# Altium PCB InvertedLayer.PcbDoc
Units mil, origin at the board's own origin, x right, y up, seen from the top; angles counter-clockwise.
Board outline 3464.57 x 3464.57 mil, 2 copper layers (Top Layer, Bottom Layer); 50 components, 28 nets, 154 pads, 84 vias.
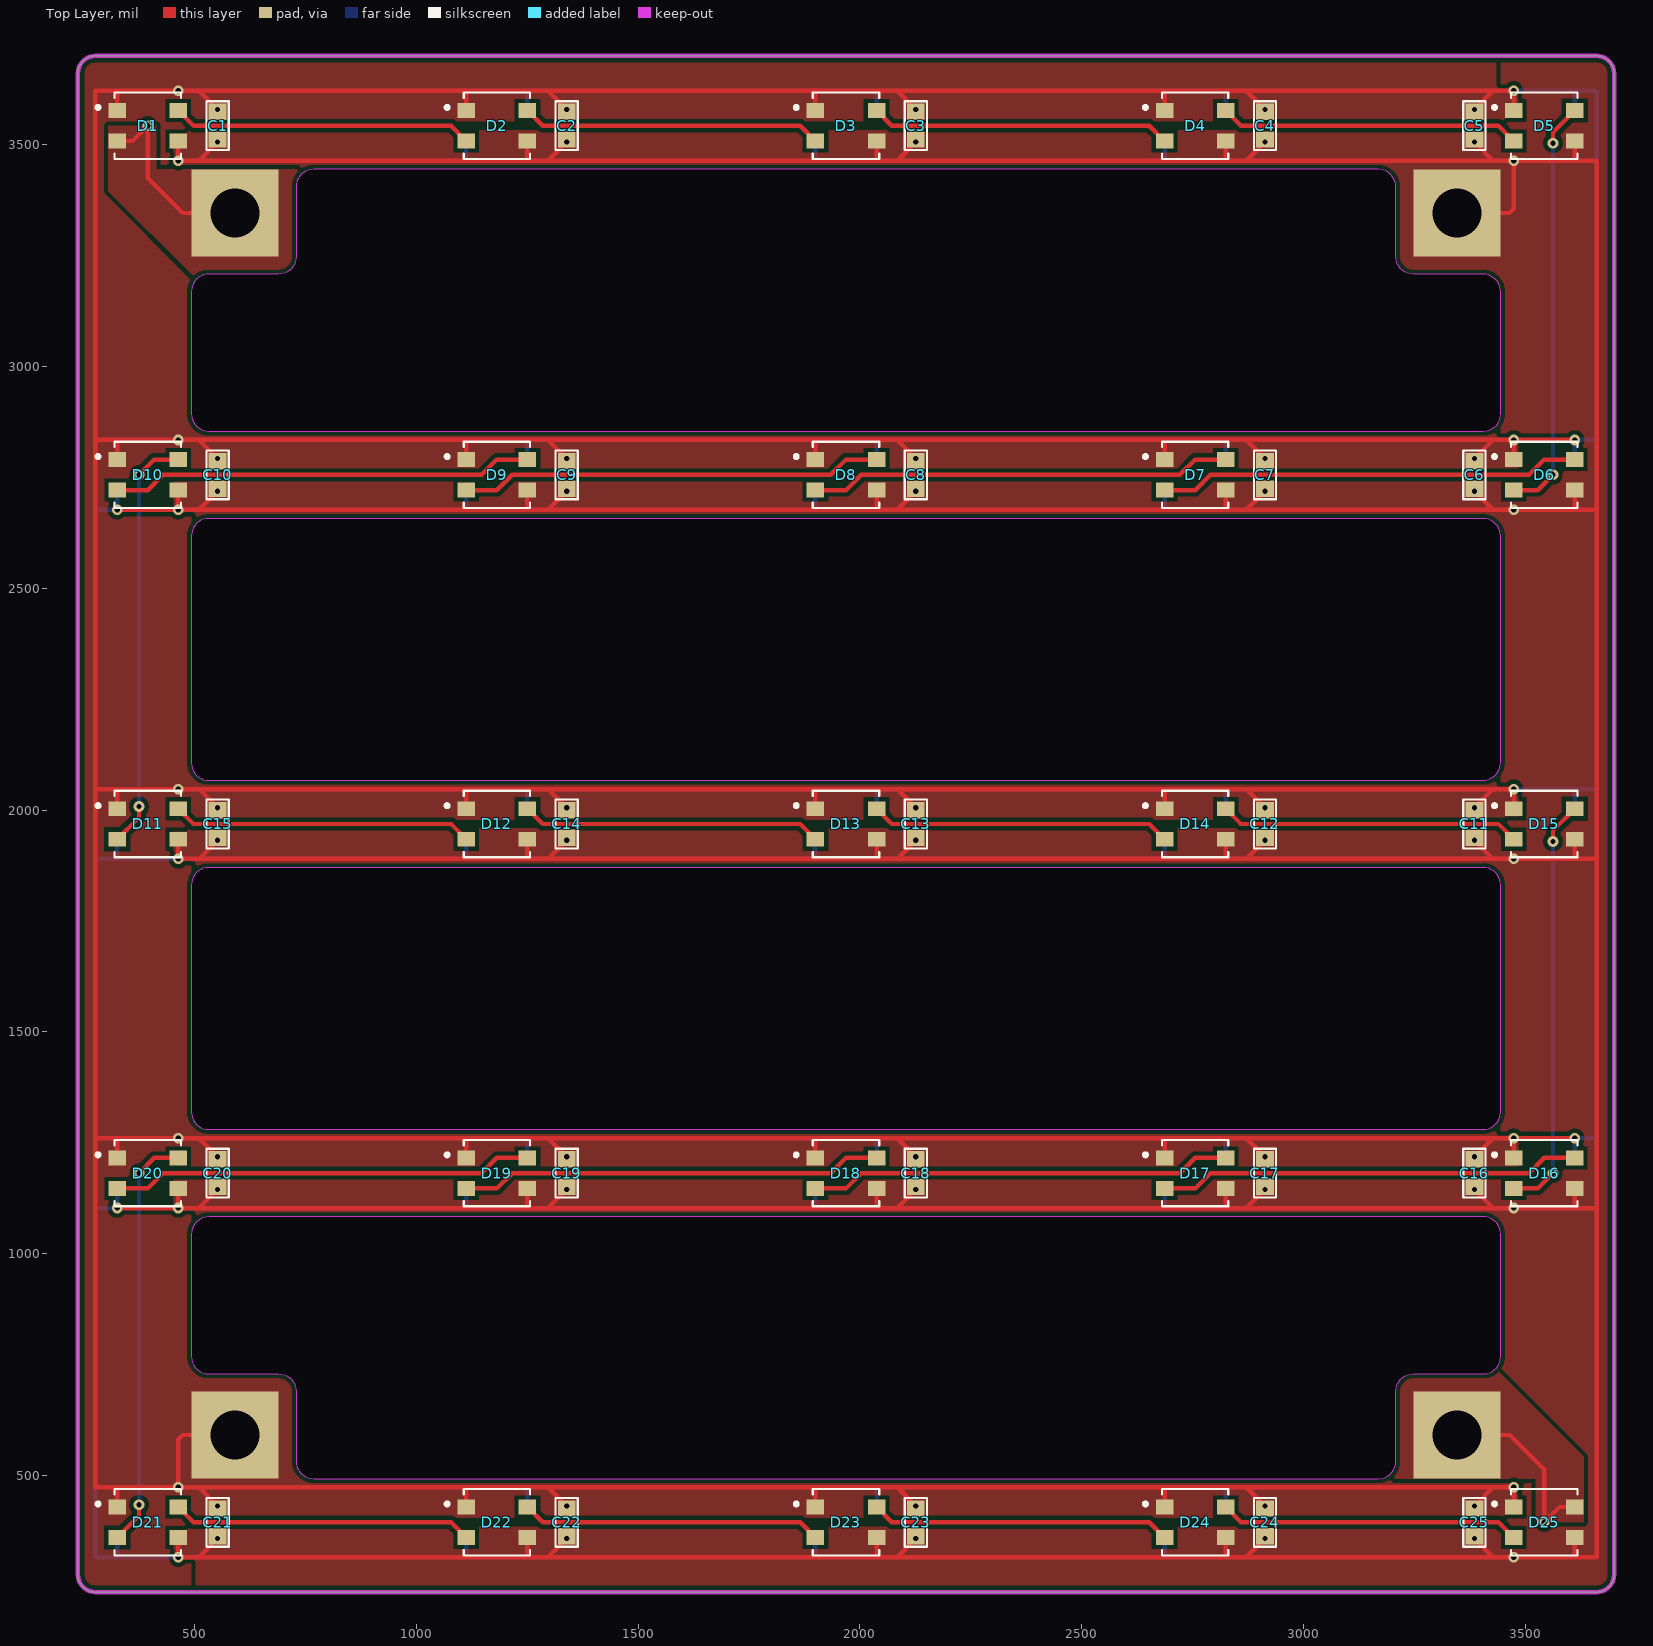
[diagram p0: Top Layer view]
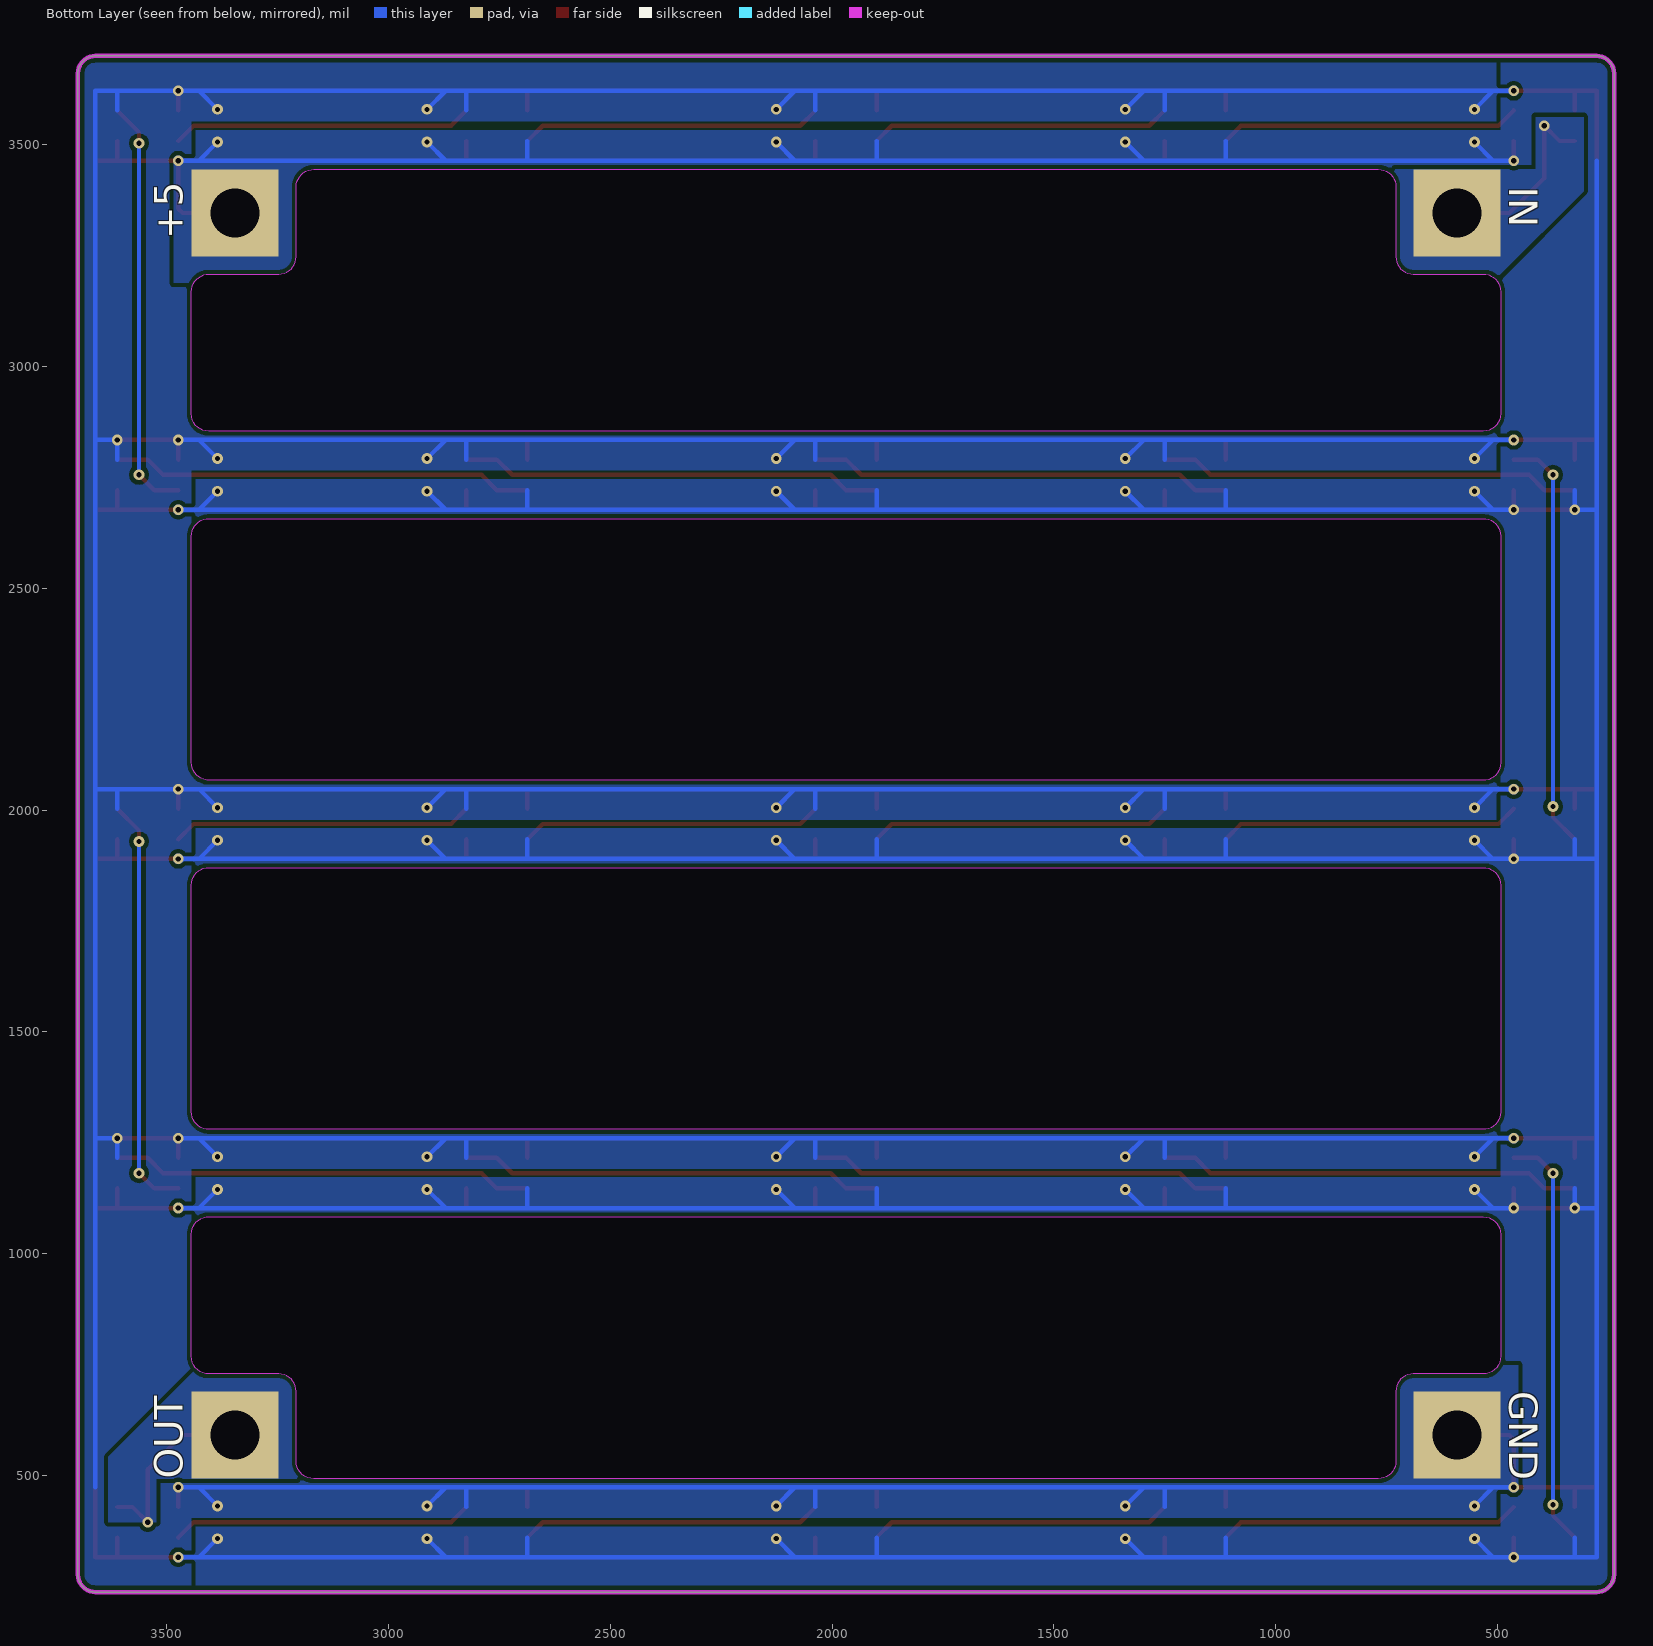
[diagram p1: Bottom Layer view, seen from below]
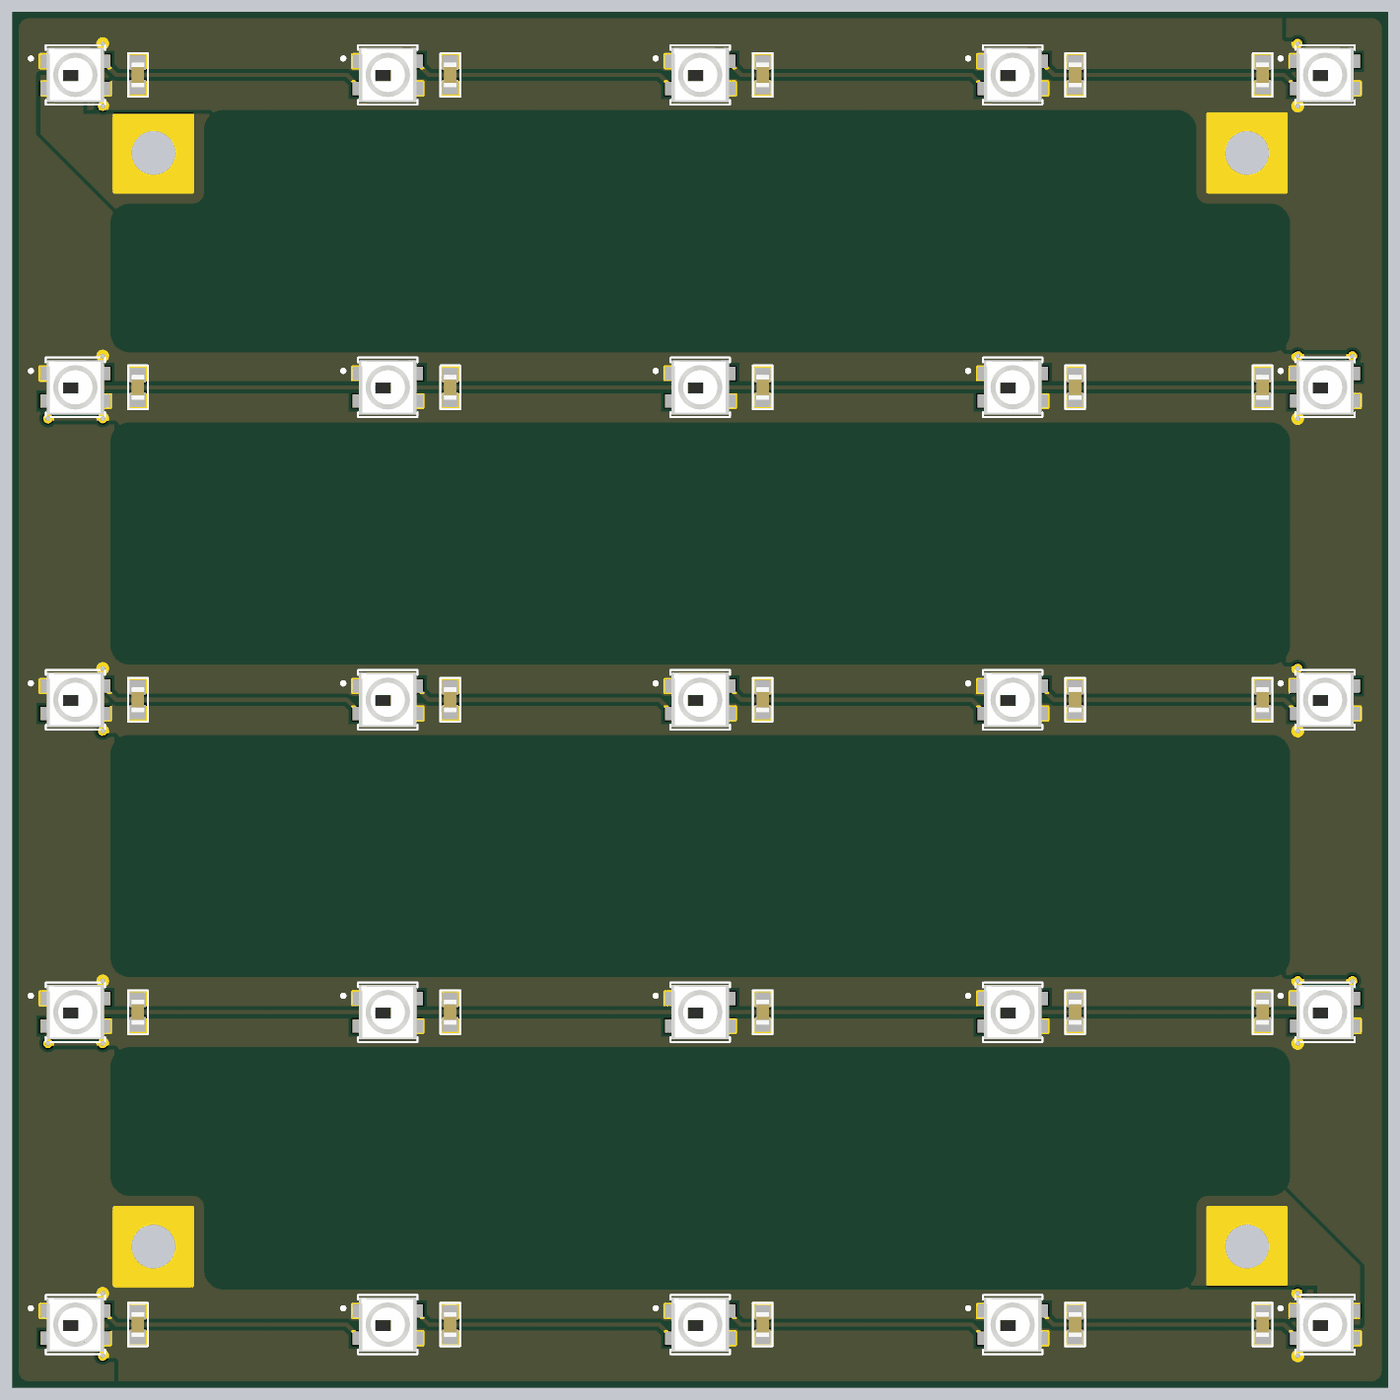
[diagram p2: 3D render of the assembled board from above, using the file's embedded part models]

## Layer stack, top to bottom
Top Solder: solder mask 0.4, Solder Resist, Dk 3.5
Top Layer: signal copper 1.4
Dielectric 1: dielectric 12.6, FR-4, Dk 4.8
Bottom Layer: signal copper 1.4
Bottom Solder: solder mask 0.4, Solder Resist, Dk 3.5

## Board outline
236.22,275.59 236.22,3661.42 cw(c275.59,3661.42) 275.59,3700.79 3661.42,3700.79 cw(c3661.42,3661.42) 3700.79,3661.42 3700.79,275.59 cw(c3661.42,275.59) 3661.42,236.22 275.59,236.22 cw(c275.59,275.59)
cut-out: 531.5,2854.33 3405.98,2854.33 ccw(c3405.98,2893.23) 3444.88,2893.23 3444.88,3168.53 ccw(c3404.76,3168.54) 3404.76,3208.66 3248.03,3208.66 cw(c3248.03,3248.03) 3208.66,3248.03 3208.66,3404.75 ccw(c3168.54,3404.76) 3168.53,3444.88 767.72,3444.88 ccw(c767.72,3405.51) 728.35,3405.51 728.35,3248.03 cw(c688.98,3248.03) 688.98,3208.66 531.5,3208.66 ccw(c531.5,3169.29) 492.13,3169.29 492.13,2893.7 ccw(c531.5,2893.7)
cut-out: 3405.51,1082.68 531.5,1082.68 ccw(c531.5,1043.31) 492.13,1043.31 492.13,767.72 ccw(c531.5,767.72) 531.5,728.35 688.98,728.35 cw(c688.98,688.98) 728.35,688.98 728.35,531.5 ccw(c767.72,531.5) 767.72,492.13 3169.29,492.13 ccw(c3169.29,531.5) 3208.66,531.5 3208.66,688.98 cw(c3248.03,688.98) 3248.03,728.35 3405.51,728.35 ccw(c3405.51,767.72) 3444.88,767.72 3444.88,1043.31 ccw(c3405.51,1043.31)
cut-out: 492.13,2618.11 492.13,2106.3 ccw(c531.5,2106.3) 531.5,2066.93 3403.97,2066.93 ccw(c3403.97,2107.84) 3444.88,2107.84 3444.88,2617.35 ccw(c3404.76,2617.35) 3404.76,2657.48 531.5,2657.48 ccw(c531.49,2618.11)
cut-out: 492.13,1830.71 492.13,1318.9 ccw(c531.5,1318.9) 531.5,1279.53 3404.76,1279.53 ccw(c3404.76,1319.65) 3444.88,1319.65 3444.88,1830.71 ccw(c3405.51,1830.71) 3405.51,1870.08 531.5,1870.08 ccw(c531.5,1830.71)

## Design rules (kind name [scope] priority, off if disabled: settings)
Clearance [All] p1: gap=6 ignorepadtopadclearanceinfootprint=FALSE
PolygonConnect [All] p1: connectstyle=Direct reliefconductorwidth=10 reliefentries=4 polygonreliefangle="90 Angle" airgapwidth=10
RoutingVias [All] p1: holewidth=12 width=24 viastyle="Through Hole" minholewidth=12 minwidth=24 maxholewidth=100 maxwidth=100
SolderMaskExpansion [All] p1: expansion=4
UnRoutedNet [All] p1: checkbadconnections=TRUE
Width [All] p1: maxlimit=20 minlimit=8 preferedwidth=10
29 further rules are at their usual default settings.

## Components (designator, comment, footprint, x,y, rotation, side; value= is the part's Value field where it differs from the comment)
C1 "CAP0603_100nF_X7R" C0603 551.18,3543.31 r270 top
C2 "CAP0603_100nF_X7R" C0603 1338.58,3543.31 r90 top
C3 "CAP0603_100nF_X7R" C0603 2125.98,3543.31 r90 top
C4 "CAP0603_100nF_X7R" C0603 2913.39,3543.31 r90 top
C5 "CAP0603_100nF_X7R" C0603 3385.83,3543.31 r90 top
C6 "CAP0603_100nF_X7R" C0603 3385.83,2755.91 r270 top
C7 "CAP0603_100nF_X7R" C0603 2913.39,2755.91 r270 top
C8 "CAP0603_100nF_X7R" C0603 2125.98,2755.91 r270 top
C9 "CAP0603_100nF_X7R" C0603 1338.58,2755.91 r270 top
C10 "CAP0603_100nF_X7R" C0603 551.18,2755.91 r270 top
C11 "CAP0603_100nF_X7R" C0603 3385.83,1968.5 r270 top
C12 "CAP0603_100nF_X7R" C0603 2913.39,1968.5 r270 top
C13 "CAP0603_100nF_X7R" C0603 2125.98,1968.5 r270 top
C14 "CAP0603_100nF_X7R" C0603 1338.58,1968.5 r270 top
C15 "CAP0603_100nF_X7R" C0603 551.18,1968.5 r270 top
C16 "CAP0603_100nF_X7R" C0603 3385.83,1181.1 r270 top
C17 "CAP0603_100nF_X7R" C0603 2913.39,1181.1 r270 top
C18 "CAP0603_100nF_X7R" C0603 2125.98,1181.1 r270 top
C19 "CAP0603_100nF_X7R" C0603 1338.58,1181.1 r270 top
C20 "CAP0603_100nF_X7R" C0603 551.18,1181.1 r270 top
C21 "CAP0603_100nF_X7R" C0603 551.18,393.7 r270 top
C22 "CAP0603_100nF_X7R" C0603 1338.58,393.7 r270 top
C23 "CAP0603_100nF_X7R" C0603 2125.98,393.7 r270 top
C24 "CAP0603_100nF_X7R" C0603 2913.39,393.7 r270 top
C25 "CAP0603_100nF_X7R" C0603 3385.83,393.7 r270 top
D1 "WS2812B-Mini" WS2812B-3535 393.7,3543.31 r0 top locked
D2 "WS2812B-Mini" WS2812B-3535 1181.1,3543.31 r0 top locked
D3 "WS2812B-Mini" WS2812B-3535 1968.5,3543.31 r0 top locked
D4 "WS2812B-Mini" WS2812B-3535 2755.91,3543.31 r0 top locked
D5 "WS2812B-Mini" WS2812B-3535 3543.31,3543.31 r0 top locked
D6 "WS2812B-Mini" WS2812B-3535 3543.31,2755.91 r0 top locked
D7 "WS2812B-Mini" WS2812B-3535 2755.91,2755.91 r0 top locked
D8 "WS2812B-Mini" WS2812B-3535 1968.5,2755.91 r0 top locked
D9 "WS2812B-Mini" WS2812B-3535 1181.1,2755.91 r0 top locked
D10 "WS2812B-Mini" WS2812B-3535 393.7,2755.91 r0 top locked
D11 "WS2812B-Mini" WS2812B-3535 393.7,1968.5 r0 top locked
D12 "WS2812B-Mini" WS2812B-3535 1181.1,1968.5 r0 top locked
D13 "WS2812B-Mini" WS2812B-3535 1968.5,1968.5 r0 top locked
D14 "WS2812B-Mini" WS2812B-3535 2755.91,1968.5 r0 top locked
D15 "WS2812B-Mini" WS2812B-3535 3543.31,1968.5 r0 top locked
D16 "WS2812B-Mini" WS2812B-3535 3543.31,1181.1 r0 top locked
D17 "WS2812B-Mini" WS2812B-3535 2755.91,1181.1 r0 top locked
D18 "WS2812B-Mini" WS2812B-3535 1968.5,1181.1 r0 top locked
D19 "WS2812B-Mini" WS2812B-3535 1181.1,1181.1 r0 top locked
D20 "WS2812B-Mini" WS2812B-3535 393.7,1181.1 r0 top locked
D21 "WS2812B-Mini" WS2812B-3535 393.7,393.7 r0 top locked
D22 "WS2812B-Mini" WS2812B-3535 1181.1,393.7 r0 top locked
D23 "WS2812B-Mini" WS2812B-3535 1968.5,393.7 r0 top locked
D24 "WS2812B-Mini" WS2812B-3535 2755.91,393.7 r0 top locked
D25 "WS2812B-Mini" WS2812B-3535 3543.31,393.7 r0 top locked

## Footprints (in the part's own frame and the unit in brackets; to place one, negate y for a bottom-side part, rotate by r counter-clockwise, add the part's x,y. Pads: shape width x height; smd on the part's side, far side on the other; paste and mask are expansions set on the pad)
C0603 [mm]
  rect 0.94x1.02 smd: 1(-0.79,0) 2(0.79,0)
  silkscreen extent -1.4,-0.64 1.4,0.64, body extent -0.8,-0.41 0.8,0.41, height 0.82
WS2812B-3535 [mm]
  rect 1x0.85 smd: 1(-1.75,0.875) 2(-1.75,-0.875) 3(1.75,-0.875) 4(1.75,0.875)
  silkscreen extent -2.95,-1.9 1.9,1.9, body extent -1.84,-1.74 1.84,1.74, height 1.96

## Part data
C1 C2 C3 C4 C5 C6 C7 C8 C9 C10 C11 C12 C13 C14 C15 C16 C17 C18 C19 C20 C21 C22 C23 C24 C25: library part CAP, "CAP0603 100nF X5R/X7R 25V", LCSC Part #=C1590, MF="Samsung Electro-Mechanics", MP=CL10B104KA8NNNC
D1 D2 D3 D4 D5 D6 D7 D8 D9 D10 D11 D12 D13 D14 D15 D16 D17 D18 D19 D20 D21 D22 D23 D24 D25: library part WS2812B-3535, "WS2812B-Mini 35x35mm", LCSC Part #=C114583, MF=Worldsemi, MP=WS2812B-Mini

## Free pads (board coordinates)
  rect 196.85x196.85 hole 110.24: ""(590.55,590.55) ""(590.55,3346.46) ""(3346.46,590.55) ""(3346.46,3346.46)

## Via types
v1: diameter 24, hole 12, Top Layer to Bottom Layer, tented both sides, 50 vias
v2: diameter 24, hole 12, Top Layer to Bottom Layer, 34 vias

## Nets (pads, with @x,y where several pads share a name; then routed paths per layer and width w, separated by ;. In a path a pad name is that pad's centre, name@x,y a point inside that pad or via, vN(x,y) a via of type N, cw(c..) or ccw(c..) an arc to the next point about the centre after c; other vN are vias at no path point)
+5: C1.2 C2.1 C3.1 C4.1 C5.1 C6.2 C7.2 C8.2 C9.2 C10.2 C11.2 C12.2 C13.2 C14.2 C15.2 C16.2 C17.2 C18.2 C19.2 C20.2 C21.2 C22.2 C23.2 C24.2 C25.2 D1.3 D2.3 D3.3 D4.3 D5.3 D6.3 D7.3 D8.3 D9.3 D10.3 D11.3 D12.3 D13.3 D14.3 D15.3 D16.3 D17.3 D18.3 D19.3 D20.3 D21.3 D22.3 D23.3 D24.3 D25.3 pad.@3346.46,3346.46 | length 43384.9
  Top Layer w10: v2(324.8,1102.36) v2(462.6,1102.36) ; v2(324.8,2677.17) v2(462.6,2677.17) ; D21.3 v2(462.6,314.96) 509.25,314.96 ; D20.3 v2(462.6,1102.36) ; D11.3 v2(462.6,1889.76) 509.25,1889.76 ; D10.3 v2(462.6,2677.17) ; D1.3 v2(462.6,3464.57) 509.25,3464.57 ; v1(551.18,356.89) 509.25,314.96 ; 551.18,1102.36 509.25,1102.36 ; v1(551.18,1144.29) 509.25,1102.36 ; v1(551.18,1931.69) 509.25,1889.76 ; 551.18,2677.17 509.25,2677.17 ; v1(551.18,2719.09) 509.25,2677.17 ; v1(551.18,3506.5) 509.25,3464.57 ; D22.3 1250,314.96 ; D19.3 1250,1102.36 ; D12.3 1250,1889.76 ; D9.3 1250,2677.17 ; D2.3 1250,3464.57 ; v1(1338.58,356.89) 1296.65,314.96 ; v1(1338.58,1144.29) 1296.65,1102.36 ; v1(1338.58,1931.69) 1296.65,1889.76 ; v1(1338.58,2719.09) 1296.65,2677.17 ; v1(1338.58,3506.5) 1296.65,3464.57 ; D23.3 2037.4,314.96 ; D18.3 2037.4,1102.36 ; D13.3 2037.4,1889.76 ; D8.3 2037.4,2677.17 ; D3.3 2037.4,3464.57 ; v1(2125.98,356.89) 2084.06,314.96 ; v1(2125.98,1144.29) 2084.06,1102.36 ; v1(2125.98,1931.69) 2084.06,1889.76 ; v1(2125.98,2719.09) 2084.06,2677.17 ; v1(2125.98,3506.5) 2084.06,3464.57 ; D24.3 2824.8,314.96 ; D17.3 2824.8,1102.36 ; D14.3 2824.8,1889.76 ; D7.3 2824.8,2677.17 ; D4.3 2824.8,3464.57 ; v1(2913.39,356.89) 2871.46,314.96 ; v1(2913.39,1144.29) 2871.46,1102.36 ; v1(2913.39,1931.69) 2871.46,1889.76 ; v1(2913.39,2719.09) 2871.46,2677.17 ; v1(2913.39,3506.5) 2871.46,3464.57 ; pad.@3346.46,3346.46 3464.57,3346.46 3474.41,3356.3 v2(3474.41,3464.57) ; v1(3385.83,356.89) 3427.76,314.96 ; v1(3385.83,1144.29) 3427.76,1102.36 ; v1(3385.83,1931.69) 3427.76,1889.76 ; v1(3385.83,2719.09) 3427.76,2677.17 ; v1(3385.83,3506.5) 3427.76,3464.57 ; v2(3474.41,314.96) 3427.76,314.96 ; D25.3 3612.2,314.96 ; D16.3 3612.2,1102.36 ; D15.3 3612.2,1889.76 ; D6.3 3612.2,2677.17 ; D5.3 3612.2,3464.57 ; 3661.42,1102.36 3612.2,1102.36 ; 3661.42,1889.76 3612.2,1889.76 ; 3661.42,2677.17 3612.2,2677.17 ; v2(462.6,1102.36) 509.25,1102.36 ; v2(462.6,2677.17) 509.25,2677.17 ; 509.25,314.96 1250,314.96 ; 509.25,1102.36 1250,1102.36 ; 509.25,1889.76 1250,1889.76 ; 509.25,2677.17 1250,2677.17 ; 509.25,3464.57 1250,3464.57 ; 1250,314.96 1296.65,314.96 ; 1250,1102.36 1296.65,1102.36 ; 1250,1889.76 1296.65,1889.76 ; 1250,2677.17 1296.65,2677.17 ; 1250,3464.57 1296.65,3464.57 ; 1296.65,314.96 2037.4,314.96 ; 1296.65,1102.36 2037.4,1102.36 ; 1296.65,1889.76 2037.4,1889.76 ; 1296.65,2677.17 2037.4,2677.17 ; 1296.65,3464.57 2037.4,3464.57 ; 2037.4,314.96 2084.06,314.96 ; 2037.4,1102.36 2084.06,1102.36 ; 2037.4,1889.76 2084.06,1889.76 ; 2037.4,2677.17 2084.06,2677.17 ; 2037.4,3464.57 2084.06,3464.57 ; 2084.06,314.96 2824.8,314.96 ; 2084.06,1102.36 2824.8,1102.36 ; 2084.06,1889.76 2824.8,1889.76 ; 2084.06,2677.17 2824.8,2677.17 ; 2084.06,3464.57 2824.8,3464.57 ; 2824.8,314.96 2871.46,314.96 ; 2824.8,1102.36 2871.46,1102.36 ; 2824.8,1889.76 2871.46,1889.76 ; 2824.8,2677.17 2871.46,2677.17 ; 2824.8,3464.57 2871.46,3464.57 ; 2871.46,314.96 3427.76,314.96 ; 2871.46,1102.36 3427.76,1102.36 ; 2871.46,1889.76 3427.76,1889.76 ; 2871.46,2677.17 3427.76,2677.17 ; 2871.46,3464.57 3427.76,3464.57 ; 3427.76,314.96 3612.2,314.96 ; 3427.76,1102.36 3612.2,1102.36 ; 3427.76,1889.76 v2(3474.41,1889.76) 3612.2,1889.76 ; 3427.76,2677.17 v2(3474.41,2677.17) 3612.2,2677.17 ; 3427.76,3464.57 v2(3474.41,3464.57) ; v2(3474.41,3464.57) 3612.2,3464.57 ; 3612.2,314.96 3661.42,314.96 3661.42,359.25 3661.42,1934.06 3661.42,2721.46 3661.42,3464.57 3612.2,3464.57
  Bottom Layer w10: 275.59,3464.57 275.59,2677.17 ; 324.8,359.25 324.8,314.96 ; 324.8,1146.65 v2(324.8,1102.36) 275.59,1102.36 ; 324.8,1934.06 324.8,1889.76 ; 324.8,2721.46 v2(324.8,2677.17) 275.59,2677.17 ; v2(462.6,1102.36) 509.25,1102.36 ; v2(462.6,2677.17) 509.25,2677.17 ; v2(462.6,3464.57) 509.25,3464.57 ; v1(551.18,356.89) 509.25,314.96 ; v1(551.18,1144.29) 509.25,1102.36 ; v1(551.18,1931.69) 509.25,1889.76 ; v1(551.18,2719.09) 509.25,2677.17 ; v1(551.18,3506.5) 509.25,3464.57 ; 1112.2,359.25 1112.2,314.96 ; 1112.2,1146.65 1112.2,1102.36 ; 1112.2,1934.06 1112.2,1889.76 ; 1112.2,2721.46 1112.2,2677.17 ; 1112.2,3508.86 1112.2,3464.57 ; v1(1338.58,356.89) 1296.65,314.96 ; v1(1338.58,1144.29) 1296.65,1102.36 ; v1(1338.58,1931.69) 1296.65,1889.76 ; v1(1338.58,2719.09) 1296.65,2677.17 ; v1(1338.58,3506.5) 1296.65,3464.57 ; 1899.61,359.25 1899.61,314.96 ; 1899.61,1146.65 1899.61,1102.36 ; 1899.61,1934.06 1899.61,1889.76 ; 1899.61,2721.46 1899.61,2677.17 ; 1899.61,3508.86 1899.61,3464.57 ; v1(2125.98,356.89) 2084.06,314.96 ; v1(2125.98,1144.29) 2084.06,1102.36 ; v1(2125.98,1931.69) 2084.06,1889.76 ; v1(2125.98,2719.09) 2084.06,2677.17 ; v1(2125.98,3506.5) 2084.06,3464.57 ; 2687.01,359.25 2687.01,314.96 ; 2687.01,1146.65 2687.01,1102.36 ; 2687.01,1934.06 2687.01,1889.76 ; 2687.01,2721.46 2687.01,2677.17 ; 2687.01,3508.86 2687.01,3464.57 ; v1(2913.39,356.89) 2871.46,314.96 ; v1(2913.39,1144.29) 2871.46,1102.36 ; v1(2913.39,1931.69) 2871.46,1889.76 ; v1(2913.39,2719.09) 2871.46,2677.17 ; v1(2913.39,3506.5) 2871.46,3464.57 ; v1(3385.83,356.89) 3427.76,314.96 ; v1(3385.83,1144.29) 3427.76,1102.36 ; v1(3385.83,1931.69) 3427.76,1889.76 ; v1(3385.83,2719.09) 3427.76,2677.17 ; v1(3385.83,3506.5) 3427.76,3464.57 ; v2(3474.41,314.96) 3427.76,314.96 ; v2(3474.41,1102.36) 3427.76,1102.36 ; v2(3474.41,1889.76) 3427.76,1889.76 ; v2(3474.41,2677.17) 3427.76,2677.17 ; v2(3474.41,3464.57) 3427.76,3464.57 ; 275.59,1102.36 275.59,1889.76 ; 275.59,1102.36 275.59,359.25 275.59,314.96 324.8,314.96 ; 275.59,1889.76 275.59,2677.17 ; 275.59,1889.76 324.8,1889.76 ; 324.8,314.96 509.25,314.96 ; 324.8,1889.76 v2(462.6,1889.76) 509.25,1889.76 ; 509.25,314.96 1112.2,314.96 ; 509.25,1102.36 1112.2,1102.36 ; 509.25,1889.76 1112.2,1889.76 ; 509.25,2677.17 1112.2,2677.17 ; 509.25,3464.57 1112.2,3464.57 ; 1112.2,314.96 1296.65,314.96 ; 1112.2,1102.36 1296.65,1102.36 ; 1112.2,1889.76 1296.65,1889.76 ; 1112.2,2677.17 1296.65,2677.17 ; 1112.2,3464.57 1296.65,3464.57 ; 1296.65,314.96 1899.61,314.96 ; 1296.65,1102.36 1899.61,1102.36 ; 1296.65,1889.76 1899.61,1889.76 ; 1296.65,2677.17 1899.61,2677.17 ; 1296.65,3464.57 1899.61,3464.57 ; 1899.61,314.96 2084.06,314.96 ; 1899.61,1102.36 2084.06,1102.36 ; 1899.61,1889.76 2084.06,1889.76 ; 1899.61,2677.17 2084.06,2677.17 ; 1899.61,3464.57 2084.06,3464.57 ; 2084.06,314.96 2687.01,314.96 ; 2084.06,1102.36 2687.01,1102.36 ; 2084.06,1889.76 2687.01,1889.76 ; 2084.06,2677.17 2687.01,2677.17 ; 2084.06,3464.57 2687.01,3464.57 ; 2687.01,314.96 2871.46,314.96 ; 2687.01,1102.36 2871.46,1102.36 ; 2687.01,1889.76 2871.46,1889.76 ; 2687.01,2677.17 2871.46,2677.17 ; 2687.01,3464.57 2871.46,3464.57 ; 2871.46,314.96 3427.76,314.96 ; 2871.46,1102.36 3427.76,1102.36 ; 2871.46,1889.76 3427.76,1889.76 ; 2871.46,2677.17 3427.76,2677.17 ; 2871.46,3464.57 3427.76,3464.57
GND: C1.1 C2.2 C3.2 C4.2 C5.2 C6.1 C7.1 C8.1 C9.1 C10.1 C11.1 C12.1 C13.1 C14.1 C15.1 C16.1 C17.1 C18.1 C19.1 C20.1 C21.1 C22.1 C23.1 C24.1 C25.1 D1.1 D2.1 D3.1 D4.1 D5.1 D6.1 D7.1 D8.1 D9.1 D10.1 D11.1 D12.1 D13.1 D14.1 D15.1 D16.1 D17.1 D18.1 D19.1 D20.1 D21.1 D22.1 D23.1 D24.1 D25.1 pad.@590.55,590.55 | length 43342
  Top Layer w10: 275.59,1259.84 324.8,1259.84 ; D21.1 324.8,472.44 ; D20.1 324.8,1259.84 ; D11.1 324.8,2047.24 ; D10.1 324.8,2834.65 ; D1.1 324.8,3622.05 ; v2(462.6,472.44) 462.6,580.71 472.44,590.55 pad.@590.55,590.55 ; 531.5,1259.84 509.25,1259.84 ; v1(551.18,430.51) 509.25,472.44 ; v1(551.18,1217.91) 509.25,1259.84 ; v1(551.18,2005.31) 509.25,2047.24 ; v1(551.18,2792.72) 509.25,2834.65 ; v1(551.18,3580.12) 509.25,3622.05 ; D22.1 1112.2,472.44 ; D19.1 1112.2,1259.84 ; D12.1 1112.2,2047.24 ; D9.1 1112.2,2834.65 ; D2.1 1112.2,3622.05 ; v1(1338.58,430.51) 1296.65,472.44 ; v1(1338.58,1217.91) 1296.65,1259.84 ; v1(1338.58,2005.31) 1296.65,2047.24 ; v1(1338.58,2792.72) 1296.65,2834.65 ; v1(1338.58,3580.12) 1296.65,3622.05 ; D23.1 1899.61,472.44 ; D18.1 1899.61,1259.84 ; D13.1 1899.61,2047.24 ; D8.1 1899.61,2834.65 ; D3.1 1899.61,3622.05 ; v1(2125.98,430.51) 2084.06,472.44 ; v1(2125.98,1217.91) 2084.06,1259.84 ; v1(2125.98,2005.31) 2084.06,2047.24 ; v1(2125.98,2792.72) 2084.06,2834.65 ; v1(2125.98,3580.12) 2084.06,3622.05 ; D24.1 2687.01,472.44 ; D17.1 2687.01,1259.84 ; D14.1 2687.01,2047.24 ; D7.1 2687.01,2834.65 ; D4.1 2687.01,3622.05 ; v1(2913.39,430.51) 2871.46,472.44 ; v1(2913.39,1217.91) 2871.46,1259.84 ; v1(2913.39,2005.31) 2871.46,2047.24 ; v1(2913.39,2792.72) 2871.46,2834.65 ; v1(2913.39,3580.12) 2871.46,3622.05 ; v1(3385.83,430.51) 3427.76,472.44 ; v1(3385.83,1217.91) 3427.76,1259.84 ; v1(3385.83,2005.31) 3427.76,2047.24 ; v1(3385.83,2792.72) 3427.76,2834.65 ; v1(3385.83,3580.12) 3427.76,3622.05 ; D25.1 v2(3474.41,472.44) 3427.76,472.44 ; D16.1 v2(3474.41,1259.84) ; D15.1 v2(3474.41,2047.24) 3427.76,2047.24 ; D6.1 v2(3474.41,2834.65) ; D5.1 v2(3474.41,3622.05) 3427.76,3622.05 ; v2(3612.2,1259.84) v2(3474.41,1259.84) ; v2(3612.2,2834.65) v2(3474.41,2834.65) ; 275.59,2047.24 275.59,472.44 509.25,472.44 ; 275.59,2047.24 275.59,2834.65 ; 275.59,2047.24 324.8,2047.24 ; 275.59,2834.65 275.59,3622.05 324.8,3622.05 ; 275.59,2834.65 324.8,2834.65 ; 324.8,1259.84 v2(462.6,1259.84) 509.25,1259.84 ; 324.8,2047.24 509.25,2047.24 ; 324.8,2834.65 v2(462.6,2834.65) 509.25,2834.65 ; 324.8,3622.05 v2(462.6,3622.05) 509.25,3622.05 ; 509.25,472.44 1112.2,472.44 ; 509.25,1259.84 1112.2,1259.84 ; 509.25,2047.24 1112.2,2047.24 ; 509.25,2834.65 1112.2,2834.65 ; 509.25,3622.05 1112.2,3622.05 ; 1112.2,472.44 1296.65,472.44 ; 1112.2,1259.84 1296.65,1259.84 ; 1112.2,2047.24 1296.65,2047.24 ; 1112.2,2834.65 1296.65,2834.65 ; 1112.2,3622.05 1296.65,3622.05 ; 1296.65,472.44 1899.61,472.44 ; 1296.65,1259.84 1899.61,1259.84 ; 1296.65,2047.24 1899.61,2047.24 ; 1296.65,2834.65 1899.61,2834.65 ; 1296.65,3622.05 1899.61,3622.05 ; 1899.61,472.44 2084.06,472.44 ; 1899.61,1259.84 2084.06,1259.84 ; 1899.61,2047.24 2084.06,2047.24 ; 1899.61,2834.65 2084.06,2834.65 ; 1899.61,3622.05 2084.06,3622.05 ; 2084.06,472.44 2687.01,472.44 ; 2084.06,1259.84 2687.01,1259.84 ; 2084.06,2047.24 2687.01,2047.24 ; 2084.06,2834.65 2687.01,2834.65 ; 2084.06,3622.05 2687.01,3622.05 ; 2687.01,472.44 2871.46,472.44 ; 2687.01,1259.84 2871.46,1259.84 ; 2687.01,2047.24 2871.46,2047.24 ; 2687.01,2834.65 2871.46,2834.65 ; 2687.01,3622.05 2871.46,3622.05 ; 2871.46,472.44 3427.76,472.44 ; 2871.46,1259.84 3427.76,1259.84 ; 2871.46,2047.24 3427.76,2047.24 ; 2871.46,2834.65 3427.76,2834.65 ; 2871.46,3622.05 3427.76,3622.05 ; 3427.76,1259.84 v2(3474.41,1259.84) ; 3427.76,2834.65 v2(3474.41,2834.65)
  Bottom Layer w10: v2(462.6,472.44) 509.25,472.44 ; v2(462.6,1259.84) 509.25,1259.84 ; v2(462.6,2047.24) 509.25,2047.24 ; v2(462.6,2834.65) 509.25,2834.65 ; v2(462.6,3622.05) 509.25,3622.05 ; v1(551.18,430.51) 509.25,472.44 ; v1(551.18,1217.91) 509.25,1259.84 ; v1(551.18,2005.31) 509.25,2047.24 ; v1(551.18,2792.72) 509.25,2834.65 ; v1(551.18,3580.12) 509.25,3622.05 ; 1250,428.15 1250,472.44 ; 1250,1215.55 1250,1259.84 ; 1250,2002.95 1250,2047.24 ; 1250,2790.35 1250,2834.65 ; 1250,3577.76 1250,3622.05 ; v1(1338.58,430.51) 1296.65,472.44 ; v1(1338.58,1217.91) 1296.65,1259.84 ; v1(1338.58,2005.31) 1296.65,2047.24 ; v1(1338.58,2792.72) 1296.65,2834.65 ; v1(1338.58,3580.12) 1296.65,3622.05 ; 2037.4,428.15 2037.4,472.44 ; 2037.4,1215.55 2037.4,1259.84 ; 2037.4,2002.95 2037.4,2047.24 ; 2037.4,2790.35 2037.4,2834.65 ; 2037.4,3577.76 2037.4,3622.05 ; v1(2125.98,430.51) 2084.06,472.44 ; v1(2125.98,1217.91) 2084.06,1259.84 ; v1(2125.98,2005.31) 2084.06,2047.24 ; v1(2125.98,2792.72) 2084.06,2834.65 ; v1(2125.98,3580.12) 2084.06,3622.05 ; 2795.28,3622.05 2824.8,3622.05 ; 2824.8,428.15 2824.8,472.44 ; 2824.8,1215.55 2824.8,1259.84 ; 2824.8,2002.95 2824.8,2047.24 ; 2824.8,2790.35 2824.8,2834.65 ; 2824.8,3577.76 2824.8,3622.05 ; 2908.39,3622.05 2871.46,3622.05 ; v1(2913.39,430.51) 2871.46,472.44 ; v1(2913.39,1217.91) 2871.46,1259.84 ; v1(2913.39,2005.31) 2871.46,2047.24 ; v1(2913.39,2792.72) 2871.46,2834.65 ; v1(2913.39,3580.12) 2871.46,3622.05 ; v1(3385.83,430.51) 3427.76,472.44 ; v1(3385.83,1217.91) 3425.2,1257.28 3425.2,1259.84 ; v1(3385.83,2005.31) 3427.76,2047.24 ; v1(3385.83,2792.72) 3427.76,2834.65 ; v1(3385.83,3580.12) 3427.76,3622.05 ; v2(3474.41,472.44) 3427.76,472.44 ; v2(3474.41,1259.84) 3425.2,1259.84 ; v2(3474.41,2834.65) 3427.76,2834.65 ; 3612.2,1215.55 v2(3612.2,1259.84) 3661.42,1259.84 ; 3612.2,2002.95 3612.2,2047.24 ; 3612.2,2790.35 v2(3612.2,2834.65) 3661.42,2834.65 ; 3612.2,3577.76 3612.2,3622.05 ; 3661.42,472.44 3661.42,1259.84 ; 509.25,472.44 1250,472.44 ; 509.25,1259.84 1250,1259.84 ; 509.25,2047.24 1250,2047.24 ; 509.25,2834.65 1250,2834.65 ; 509.25,3622.05 1250,3622.05 ; 1250,472.44 1296.65,472.44 ; 1250,1259.84 1296.65,1259.84 ; 1250,2047.24 1296.65,2047.24 ; 1250,2834.65 1296.65,2834.65 ; 1250,3622.05 1296.65,3622.05 ; 1296.65,472.44 2037.4,472.44 ; 1296.65,1259.84 2037.4,1259.84 ; 1296.65,2047.24 2037.4,2047.24 ; 1296.65,2834.65 2037.4,2834.65 ; 1296.65,3622.05 2037.4,3622.05 ; 2037.4,472.44 2084.06,472.44 ; 2037.4,1259.84 2084.06,1259.84 ; 2037.4,2047.24 2084.06,2047.24 ; 2037.4,2834.65 2084.06,2834.65 ; 2037.4,3622.05 2084.06,3622.05 ; 2084.06,472.44 2824.8,472.44 ; 2084.06,1259.84 2824.8,1259.84 ; 2084.06,2047.24 2824.8,2047.24 ; 2084.06,2834.65 2824.8,2834.65 ; 2084.06,3622.05 2824.8,3622.05 ; 2824.8,472.44 2871.46,472.44 ; 2824.8,1259.84 2871.46,1259.84 ; 2824.8,2047.24 2871.46,2047.24 ; 2824.8,2834.65 2871.46,2834.65 ; 2824.8,3622.05 2871.46,3622.05 ; 2871.46,472.44 3427.76,472.44 ; 2871.46,1259.84 3425.2,1259.84 ; 2871.46,2047.24 3427.76,2047.24 ; 2871.46,2834.65 3427.76,2834.65 ; 2871.46,3622.05 3427.76,3622.05 ; 3427.76,2047.24 v2(3474.41,2047.24) 3612.2,2047.24 ; 3427.76,3622.05 v2(3474.41,3622.05) 3612.2,3622.05 ; 3612.2,2047.24 3661.42,2047.24 ; 3612.2,3622.05 3661.42,3622.05 3661.42,2047.24 ; 3661.42,1259.84 3661.42,2047.24
IN: D1.2 pad.@590.55,3346.46 | length 430.7
  Top Layer w10: D1.2 359.25,3508.86 v2(393.7,3543.31) 393.7,3425.2 472.44,3346.46 pad.@590.55,3346.46
NetD1_4: D1.4 D2.2 | length 678.1
  Top Layer w10: D1.4 497.05,3543.31 1077.76,3543.31 D2.2
NetD2_4: D2.4 D3.2 | length 678.1
  Top Layer w10: D2.4 1284.45,3543.31 1865.16,3543.31 D3.2
NetD3_4: D3.4 D4.2 | length 678.1
  Top Layer w10: D3.4 2071.85,3543.31 2652.56,3543.31 D4.2
NetD4_4: D4.4 D5.2 | length 678.1
  Top Layer w10: D4.4 2859.25,3543.31 3439.96,3543.31 D5.2
NetD5_4: D5.4 D6.2 | length 945.1
  Top Layer w10: D6.2 3528.54,2721.46 v2(3562.99,2755.91) ; v2(3562.99,3503.94) 3562.99,3528.54 D5.4
  Bottom Layer w10: v2(3562.99,2755.91) v2(3562.99,3503.94)
NetD6_4: D6.4 D7.2 | length 953.7
  Top Layer w10: D7.2 2755.91,2721.46 2790.35,2755.91 3508.86,2755.91 3543.31,2790.35 D6.4
NetD7_4: D7.4 D8.2 | length 953.7
  Top Layer w10: D8.2 1968.5,2721.46 2002.95,2755.91 2721.46,2755.91 2755.91,2790.35 D7.4
NetD8_4: D8.4 D9.2 | length 953.7
  Top Layer w10: D9.2 1181.1,2721.46 1215.55,2755.91 1934.06,2755.91 1968.5,2790.35 D8.4
NetD9_4: D9.4 D10.2 | length 953.7
  Top Layer w10: D10.2 393.7,2721.46 428.15,2755.91 1146.65,2755.91 1181.1,2790.35 D9.4
NetD10_4: D10.4 D11.2 | length 945.1
  Top Layer w10: D11.2 374.02,1983.27 v2(374.02,2007.87) ; v2(374.02,2755.91) 408.46,2790.35 D10.4
  Bottom Layer w10: v2(374.02,2007.87) v2(374.02,2755.91)
NetD11_4: D11.4 D12.2 | length 678.1
  Top Layer w10: D11.4 497.05,1968.5 1077.76,1968.5 D12.2
NetD12_4: D12.4 D13.2 | length 678.1
  Top Layer w10: D12.4 1284.45,1968.5 1865.16,1968.5 D13.2
NetD13_4: D13.4 D14.2 | length 678.1
  Top Layer w10: D13.4 2071.85,1968.5 2652.56,1968.5 D14.2
NetD14_4: D14.4 D15.2 | length 678.1
  Top Layer w10: D14.4 2859.25,1968.5 3439.96,1968.5 D15.2
NetD15_4: D15.4 D16.2 | length 945.1
  Top Layer w10: D16.2 3528.54,1146.65 v2(3562.99,1181.1) ; v2(3562.99,1929.13) 3562.99,1953.74 D15.4
  Bottom Layer w10: v2(3562.99,1181.1) v2(3562.99,1929.13)
NetD16_4: D16.4 D17.2 | length 953.7
  Top Layer w10: D17.2 2755.91,1146.65 2790.35,1181.1 3508.86,1181.1 3543.31,1215.55 D16.4
NetD17_4: D17.4 D18.2 | length 953.7
  Top Layer w10: D18.2 1968.5,1146.65 2002.95,1181.1 2721.46,1181.1 2755.91,1215.55 D17.4
NetD18_4: D18.4 D19.2 | length 953.7
  Top Layer w10: D19.2 1181.1,1146.65 1215.55,1181.1 1934.06,1181.1 1968.5,1215.55 D18.4
NetD19_4: D19.4 D20.2 | length 953.7
  Top Layer w10: D20.2 393.7,1146.65 428.15,1181.1 1146.65,1181.1 1181.1,1215.55 D19.4
NetD20_4: D20.4 D21.2 | length 945.1
  Top Layer w10: D21.2 374.02,408.46 v2(374.02,433.07) ; v2(374.02,1181.1) 408.46,1215.55 D20.4
  Bottom Layer w10: v2(374.02,433.07) v2(374.02,1181.1)
NetD21_4: D21.4 D22.2 | length 678.1
  Top Layer w10: D21.4 497.05,393.7 1077.76,393.7 D22.2
NetD22_4: D22.4 D23.2 | length 678.1
  Top Layer w10: D22.4 1284.45,393.7 1865.16,393.7 D23.2
NetD23_4: D23.4 D24.2 | length 678.1
  Top Layer w10: D23.4 2071.85,393.7 2652.56,393.7 D24.2
NetD24_4: D24.4 D25.2 | length 678.1
  Top Layer w10: D24.4 2859.25,393.7 3439.96,393.7 D25.2
OUT: D25.4 pad.@3346.46,590.55 | length 431.3
  Top Layer w10: pad.@3346.46,590.55 3465.6,590.55 3543.31,512.85 v2(3543.31,393.7) 3577.76,428.15 D25.4

## Polygon pours and split planes (outlines as drawn)
OUT on Top Layer "Top Out" (solid, remove dead copper, pour order 12): 3188.98,748.03 3188.98,492.13 3523.62,492.13 3523.62,393.7 3631.89,393.7 3631.89,541.34 3425.2,748.03
GND on Top Layer "Top Vertical Left" (solid, remove dead copper, pour order 22): 492.13,236.22 492.13,3700.79 236.22,3700.79 236.22,236.22
IN on Top Layer "Top In" (solid, remove dead copper, pour order 8): 748.03,3188.98 748.03,3444.88 413.39,3444.88 413.39,3543.31 305.12,3543.31 305.12,3395.67 511.81,3188.98
GND on Top Layer "Top Horiz 5 GND" (solid, remove dead copper, pour order 112): 452.76,403.54 452.76,511.81 3484.25,511.81 3484.25,403.54
+5 on Top Layer "Top Horiz 5 +5" (solid, remove dead copper, pour order 114): 452.76,383.86 3484.25,383.86 3484.25,236.22 452.76,236.22
GND on Top Layer "Top Horiz 1 GND" (solid, remove dead copper, pour order 36): 3484.25,3553.15 452.76,3553.15 452.76,3700.79 3484.25,3700.79
+5 on Top Layer "Top Horiz 1 +5" (solid, remove dead copper, pour order 38): 3484.25,3533.46 3484.25,3425.2 452.76,3425.2 452.76,3533.46
+5 on Top Layer "Top Horiz 4 +5" (solid, remove dead copper, pour order 106): 3484.25,1171.26 3484.25,1062.99 452.76,1062.99 452.76,1171.26
GND on Top Layer "Top Horiz 4 GND" (solid, remove dead copper, pour order 104): 452.76,1191.02 452.76,1299.29 3484.25,1299.29 3484.25,1191.02
+5 on Top Layer "Top Vertical Right" (solid, remove dead copper, pour order 24): 3444.88,3700.79 3444.88,236.22 3700.79,236.22 3700.79,3700.79
+5 on Top Layer "Top Horiz 2 +5" (solid, remove dead copper, pour order 46): 3484.25,2746.06 3484.25,2637.8 452.76,2637.8 452.76,2746.06
GND on Top Layer "Top Horiz 2 GND" (solid, remove dead copper, pour order 44): 452.76,2765.83 452.76,2874.09 3484.25,2874.09 3484.25,2765.83
GND on Top Layer "Top Horiz 3 GND" (solid, remove dead copper, pour order 96): 452.76,1978.43 452.76,2086.69 3484.25,2086.69 3484.25,1978.43
+5 on Top Layer "Top Horiz 3 +5" (solid, remove dead copper, pour order 98): 3484.25,1958.66 3484.25,1850.39 452.76,1850.39 452.76,1958.66
GND on Top Layer "Top GND" (solid, remove dead copper, pour order 20): 748.03,748.03 452.76,748.03 452.76,472.44 748.03,472.44
+5 on Top Layer "Top +5" (solid, remove dead copper, pour order 18): 3188.98,3188.98 3484.25,3188.98 3484.25,3464.57 3188.98,3464.57
OUT on Bottom Layer "Bottom Out" (solid, remove dead copper, pour order 2): 3188.98,748.03 3188.98,492.13 3523.62,492.13 3523.62,393.7 3631.89,393.7 3631.89,541.34 3425.2,748.03
IN on Bottom Layer "Bottom In" (solid, remove dead copper, pour order 0): 748.03,3188.98 748.03,3444.88 413.39,3444.88 413.39,3562.99 305.12,3562.99 305.12,3395.67 511.81,3188.98
+5 on Bottom Layer "Bottom Vertical Left" (solid, remove dead copper, pour order 28): 492.13,236.22 492.13,3700.79 236.22,3700.79 236.22,236.22
GND on Bottom Layer "Bottom Vertical Right" (solid, remove dead copper, pour order 30): 3444.88,3700.79 3444.88,236.22 3700.79,236.22 3700.79,3700.79
+5 on Bottom Layer "Bottom Horiz 5 +5" (solid, remove dead copper, pour order 110): 452.76,383.86 3484.25,383.86 3484.25,236.22 452.76,236.22
GND on Bottom Layer "Bottom Horiz 5 GND" (solid, remove dead copper, pour order 108): 452.76,403.54 452.76,511.81 3484.25,511.81 3484.25,403.54
+5 on Bottom Layer "Bottom Horiz 4 +5" (solid, remove dead copper, pour order 102): 3484.25,1171.26 3484.25,1062.99 452.76,1062.99 452.76,1171.26
GND on Bottom Layer "Bottom Horiz 4 GND" (solid, remove dead copper, pour order 100): 452.76,1191.02 452.76,1299.29 3484.25,1299.29 3484.25,1191.02
+5 on Bottom Layer "Bottom Horiz 3 +5" (solid, remove dead copper, pour order 56): 3484.25,1958.66 3484.25,1850.39 452.76,1850.39 452.76,1958.66
GND on Bottom Layer "Bottom Horiz 3 GND" (solid, remove dead copper, pour order 54): 452.76,1978.43 452.76,2086.69 3484.25,2086.69 3484.25,1978.43
+5 on Bottom Layer "Bottom Horiz 2 +5" (solid, remove dead copper, pour order 42): 3484.25,2746.06 3484.25,2637.8 452.76,2637.8 452.76,2746.06
GND on Bottom Layer "Bottom Horiz 2 GND" (solid, remove dead copper, pour order 40): 452.76,2765.83 452.76,2874.09 3484.25,2874.09 3484.25,2765.83
+5 on Bottom Layer "Bottom Horiz 1 +5" (solid, remove dead copper, pour order 34): 3484.25,3533.46 3484.25,3425.2 452.76,3425.2 452.76,3533.46
GND on Bottom Layer "Bottom Horiz 1 GND" (solid, remove dead copper, pour order 32): 3484.25,3553.15 452.76,3553.15 452.76,3700.79 3484.25,3700.79
+5 on Bottom Layer "Bottom +5" (solid, remove dead copper, pour order 14): 3188.98,3188.98 3484.25,3188.98 3484.25,3464.57 3188.98,3464.57
GND on Bottom Layer "Bottom GND" (solid, remove dead copper, pour order 16): 748.03,748.03 452.76,748.03 452.76,472.44 748.03,472.44

## Keep-outs
Keep-Out Layer:
  the board outline again, w10

## Silkscreen, mask and mechanical layers (free items; w line width, h text height)
Bottom Overlay:
  text "IN" at 472.44,3405.51 h64 r90
  text "+5" at 3464.57,3287.4 h64 r270
  text "GND" at 472.44,688.98 h64 r90
  text "OUT" at 3464.57,492.13 h64 r270
Mechanical 1:
  the board outline again, w10